# Altium PCB STM32_Tm1637_PCB1.PcbDoc
Units mil, origin at the board's own origin, x right, y up, seen from the top; angles counter-clockwise.
Board outline 6000 x 4000 mil, 2 copper layers (Top Layer, Bottom Layer); 31 components, 20 nets, 121 pads, 0 vias.
Unrouted connection lines stored in the file: 67.
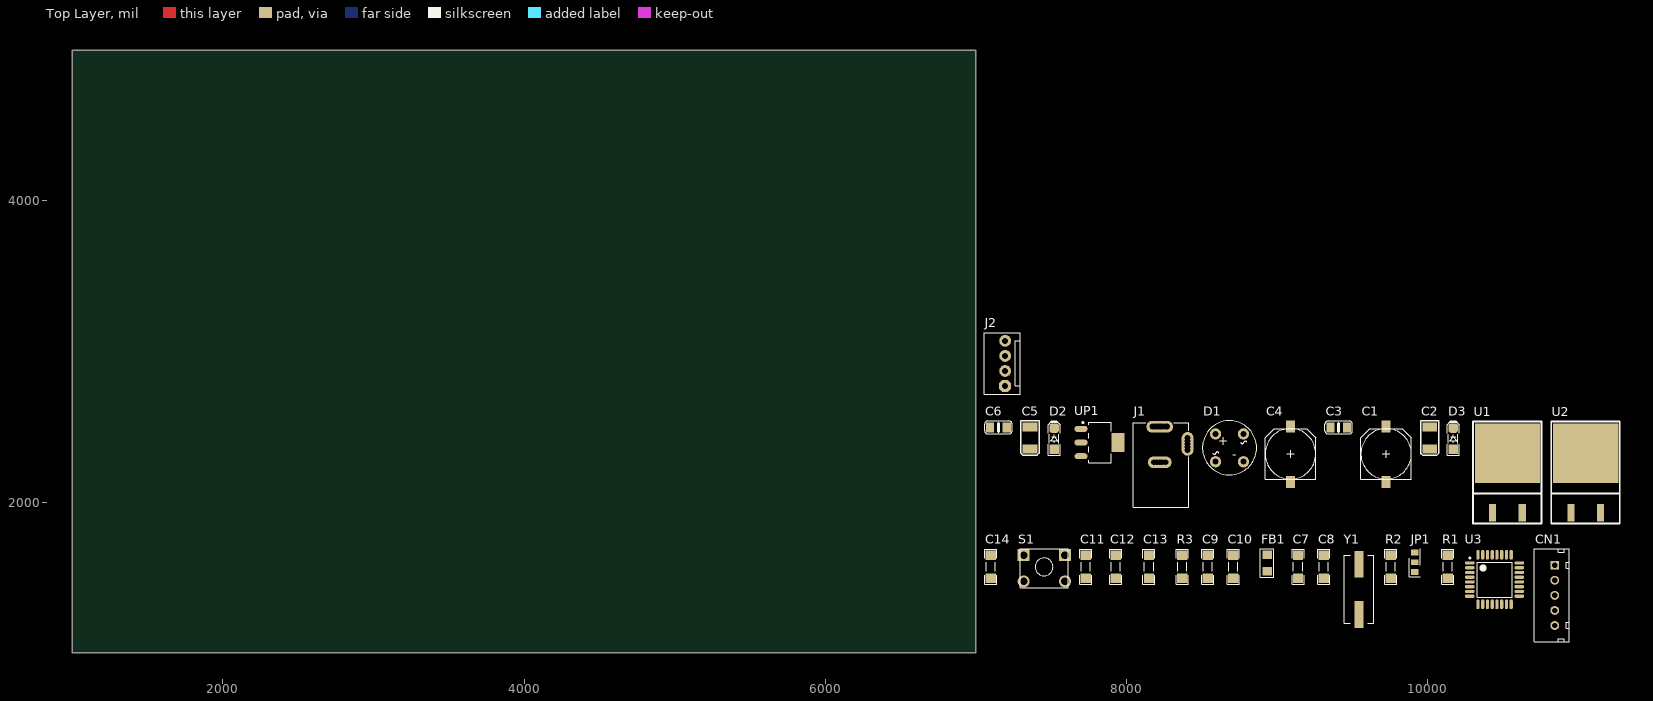
[diagram p0: Top Layer view]
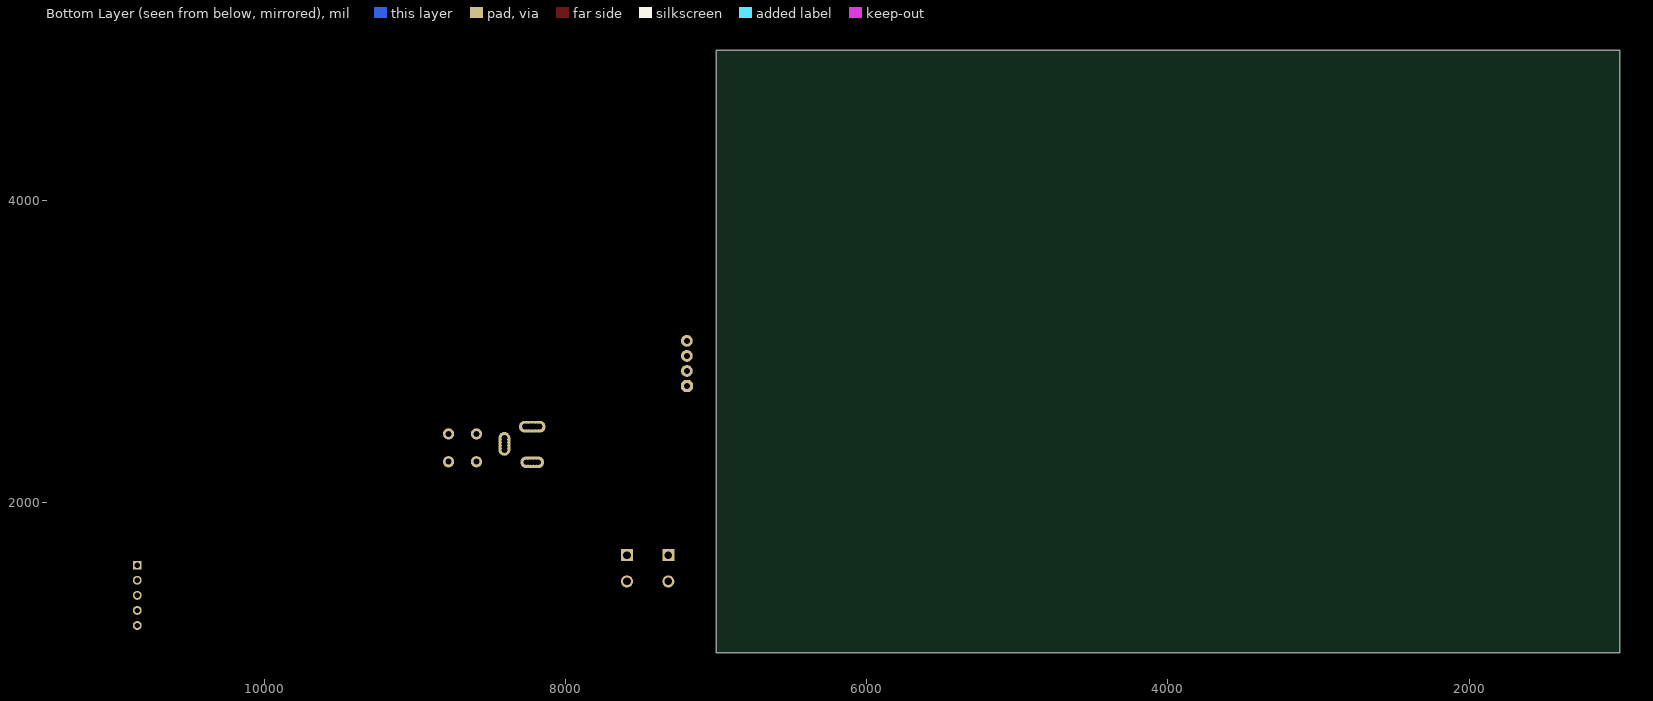
[diagram p1: Bottom Layer view, seen from below]

## Layer stack, top to bottom
Top Solder: solder mask 0.4, Solder Resist, Dk 3.5
Top Layer: signal copper 1.4
Dielectric 1: dielectric 12.6, FR-4, Dk 4.8
Bottom Layer: signal copper 1.4
Bottom Solder: solder mask 0.4, Solder Resist, Dk 3.5

## Board outline
1000,1000 7000,1000 7000,5000 1000,5000

## Design rules (kind name [scope] priority, off if disabled: settings)
Clearance [All] p1: gap=10 ignorepadtopadclearanceinfootprint=FALSE except(0: Arc-Hole Track-Hole SMDPad-Hole THPad-Hole Via-Hole Fill-Hole Poly-Hole Region-Hole Text-Hole)
PolygonConnect [All] p1: connectstyle=Relief reliefconductorwidth=10 reliefentries=4 polygonreliefangle="90 Angle" airgapwidth=10
RoutingVias [All] p1: holewidth=28 width=50 viastyle="Through Hole" minholewidth=28 minwidth=50 maxholewidth=28 maxwidth=50
SolderMaskExpansion [All] p1: expansion=4 istentingtop=FALSE
Width [All] p1: maxlimit=10 minlimit=10 preferedwidth=10
30 further rules are at their usual default settings.

## Classes and differential pairs
component class Tm1637: J2
component class PowerSupply: C1 C2 C3 C4 C5 C6 D1 D2 D3 J1 U1 U2 UP1
component class Microcontroller: C7 C8 C9 C10 C11 C12 C13 C14 CN1 FB1 JP1 R1 R2 R3 S1 U3 Y1

## Components (designator, comment, footprint, x,y, rotation, side; value= is the part's Value field where it differs from the comment)
C1 "" "CAPACITOR RADIAL SMT size F" 9725,2320 r90 top
C2 "Tantalium Cap" "Tantalium Size B" 10015,2425 r90 top
C3 "Capacitor SMD" "1206 Capacitor" 9410,2495 r0 top
C4 "" "CAPACITOR RADIAL SMT size F" 9090,2320 r90 top
C5 "Tantalium Cap" "Tantalium Size B" 7360,2425 r90 top
C6 "Capacitor SMD" "1206 Capacitor" 7150,2495 r0 top
C7 "22pF" CAPC4817X12N 9140,1570 r90 top
C8 "22pF" CAPC4817X12N 9310,1570 r90 top
C9 "0.1uF" CAPC4817X12N 8540,1570 r90 top
C10 "0.1uF" CAPC4817X12N 8710,1570 r90 top
C11 "0.1uF" CAPC4817X12N 7730,1570 r90 top
C12 "0.1uF" CAPC4817X12N 7930,1570 r90 top
C13 "0.1uF" CAPC4817X12N 8150,1570 r90 top
C14 "0.1uF" CAPC4817X12N 7100,1570 r90 top
CN1 "Header H5B-XHA" "Header H5B-XHA" 10835,1330 r90 top
D1 "Diode Bridge" "Bridge Circle Package" 8685,2360 r0 top
D2 "=VALUE" D_SOD80 7520,2420 r90 top
D3 "=VALUE" D_SOD80 10170,2420 r90 top
FB1 "Ferrit Bead" "1206 Ferrit Bead" 8935,1595 r90 top
J1 "DC Power Jack" "DC Power Jack 1" 8190,2500 r90 top
J2 "Tm1637" "CON WF_4" 7195,2920 r90 top
JP1 "Jumper" "Jumper Selector SMD" 9915,1600 r90 top
R1 "10K" RESC4817X04N 10135,1570 r90 top
R2 "10K" RESC4817X04N 9755,1570 r90 top
R3 "10K" RESC4817X04N 8370,1570 r90 top
S1 "Switch PB" "Switch - Push to On" 7455,1560 r0 top
U1 "7809-D2PAK" "D2PAK TO-263" 10530,2125 r0 top
U2 "7805-D2PAK" "D2PAK TO-263" 11050,2125 r0 top
U3 "STM32F030K6T6" STM-LQFP32_N 10445,1485 r0 top
UP1 "LM1117IMP-5.0" SOT223_4 7825,2395 r0 top value=LM1117IMP-3.3
Y1 "12 MHz" "Crystal SMD" 9545,1420 r90 top

## Footprints (in the part's own frame and the unit in brackets; to place one, negate y for a bottom-side part, rotate by r counter-clockwise, add the part's x,y. Pads: shape width x height; smd on the part's side, far side on the other; paste and mask are expansions set on the pad)
"1206 Capacitor" [mil]
  rect 55x65 smd: 1(-55,0) 2(55,0)
  silkscreen extent -92,-43 92,43, body extent -63,-31 63,31, height 39
"1206 Ferrit Bead" [mil]
  rect 55x65 smd: 1(-55,0) 2(55,0)
  silkscreen extent -95,-45 95,45, body extent -63,-31 63,31, height 26
"Bridge Circle Package" [mm] "Circle Bridge Rectifiers DESIGNER :Ali Hafizi"
  round 1.905 hole 1.016: 1(-2.35,2.35) 2(-2.35,-2.35) 3(2.35,-2.35) 4(2.35,2.35)
  silkscreen extent -4.57,-4.57 4.57,4.57, body extent -4.04,-4.07 4.06,4.03, height 5.21
"CAPACITOR RADIAL SMT size F" [mm]
  rect 2x1.5 smd mask+0.051: 1(4.603,0) 2(-4.75,0)
  silkscreen extent -4.26,-4.26 4.26,4.25, body extent -4.95,-4.15 4.95,4.15, height 10.02
CAPC4817X12N [mm] "Chip Capacitor, 2-Leads, Body 4/80x1/70mm, IPC Medium Density-Design:Abbas Basereh"
  rect 1.65x1.75 smd: 1(-1.95,0) 2(1.95,0)
  silkscreen extent -2.92,-1.02 2.92,1.02, body extent -1.6,-0.8 1.6,0.8, height 1
"CON WF_4" [mm] "DS1070  WF, Cvilux CI31 pitch 2.54mm-Designer Abbas Basereh"
  oct 2x2 hole 1: 1(-3.81,0)
  round 2 hole 1: 2(-1.27,0) 3(1.27,0) 4(3.81,0)
  silkscreen extent -5.2,-2.55 5.2,3.5, body extent -5.08,-2.4 5.08,3.4, height 11.56
"Crystal SMD" [mm] "DESIGNER ABBAS BASEREH"
  rect 4.5x1.5 smd: 1(-4.25,0) 2(4.25,0)
  silkscreen extent -5.75,-2.5 5.75,2.5, body extent -6.21,-2.25 6.09,2.25, height 5.18
"D2PAK TO-263" [mm]
  rect 1.2x3 smd: 1(-2.5,-5)
  rect 1.2x3 smd paste+0: 3(2.5,-5)
  rect 11x10 smd: 4(0,5.05)
  silkscreen extent -5.8,-6.8 5.75,10.4, body extent -5.08,-5.92 5.08,9.35, height 5.08
D_SOD80 [mm] "SOD-80 MINI-MELF 3.6X1.6mm, LL-34, LL4148"
  rect 1.6x1.6 smd paste-0.1: 1(-1.8,0)
  rrect50% 1.6x1.6 smd paste-0.1: 2(1.8,0)
  Top Layer pour cut-out: -1.016,1.016 1.016,1.016 1.016,-1.016 -1.016,-1.016
  silkscreen extent -2.8,-1 3,1, body extent -1.85,-0.8 1.85,0.8, height 2
"DC Power Jack 1" [mm] "Power Adaptor Jack"
  round 1.5 hole 1: 1(0,0.45) 1(0,0) 1(0,-0.4) 1(0,-1.2) 1(0,-1.6) 1(0,-2.05) 2(-6,-1.8) 2(-6,0.2) 2(-6,-1.3) 2(-6,-0.3) 3(-3.9,-5.5) 3(-3.4,-5.5) 3(-2.4,-5.5) 3(-1.9,-5.5)
  oval 2x4.5 hole 1: 1(0,-0.8)
  oval 2x4 hole 1: 2(-6,-0.8)
  oval 4x2 hole 1: 3(-2.9,-5.5)
  silkscreen extent -13.59,-5.7 0.7,3.7, body extent -13.68,-5.74 0.72,3.66, height 11.05
"Header H5B-XHA" [mm]
  rect 1.5x1.5 hole 0.9: 1(6.35,-0.25)
  round 1.5 hole 0.9: 2(3.81,-0.25) 3(1.27,-0.25) 4(-1.27,-0.25) 5(-3.81,-0.25)
  silkscreen extent -6.57,-2.7 9.1,3.25, body extent -6.52,-2.73 9.05,3.28, height 7
"Jumper Selector SMD" [mm]
  rect 0.95x1.3 smd: 1(-1.65,0) 2(0,0) 3(1.65,0)
  silkscreen extent -2.41,-0.89 2.29,0.89, body extent -1.85,-0.64 0.18,0.64, height 0.6
RESC4817X04N [mm] "Chip Resistor, 2-Leads, Body 4/80x1/70mm, IPC Medium Density-Design:Abbas Basereh"
  rect 1.65x1.75 smd: 1(-1.95,0) 2(1.95,0)
  silkscreen extent -2.92,-1.02 2.92,1.02, body extent -1.6,-0.8 1.6,0.8, height 1
SOT223_4 [mm] "SOT223, 4-Leads, Body 6.5x3.5mm, Pitch 2.30mm-Designer Abbas Basereh"
  oval 2.2x1 smd: 1(-3.2,2.3) 2(-3.2,0) 3(-3.2,-2.3)
  rect 2.2x3.2 smd: 4(3,0)
  Top Layer pour cut-out: -1.7,3.556 1.7,3.556 1.7,-3.556 -1.7,-3.556
  silkscreen extent -3.02,-3.4 1.9,3.47, body extent -3.5,-3.25 3.5,3.25, height 1.7
STM-LQFP32_N [mm] "QFP, 32-Leads, Body 7x7mm, Pitch 0.8mm, IPC Medium Density"
  oval 1.65x0.55 smd: 1(-4.175,2.8) 2(-4.175,2) 3(-4.175,1.2) 4(-4.175,0.4) 5(-4.175,-0.4) 6(-4.175,-1.2) 7(-4.175,-2) 8(-4.175,-2.8) 17(4.175,-2.8) 18(4.175,-2) 19(4.175,-1.2) 20(4.175,-0.4) 21(4.175,0.4) 22(4.175,1.2) 23(4.175,2) 24(4.175,2.8)
  oval 0.55x1.65 smd: 9(-2.8,-4.175) 10(-2,-4.175) 11(-1.2,-4.175) 12(-0.4,-4.175) 13(0.4,-4.175) 14(1.2,-4.175) 15(2,-4.175) 16(2.8,-4.175) 25(2.8,4.175) 26(2,4.175) 27(1.2,4.175) 28(0.4,4.175) 29(-0.4,4.175) 30(-1.2,4.175) 31(-2,4.175) 32(-2.8,4.175)
  silkscreen extent -4.3,-2.95 2.95,3.75, body extent -3.5,-3.5 3.5,3.5, height 1.6
"Switch - Push to On" [mil]
  rect 80x80 hole 50: 1(-137.5,87.5) 1(137.5,87.5)
  round 80 hole 50: 2(-137.5,-87.5) 2(137.5,-87.5)
  silkscreen extent -160,-130 160,130, body extent -155,-121 157,123, height 205
"Tantalium Size B" [mm]
  rect 1.5x2.5 smd paste+0.038 mask+0.038: 1(-1.831,0) 2(1.832,0)
  silkscreen extent -2.88,-1.53 2.88,1.53, body extent -1.83,-1.4 1.83,1.4, height 1.95

## Part data
C1 C2 C4 C5: library part "Capacitor Tantalium"
C7 C8 C9 C10 C11 C12 C13 C14: library part "CAP SMD 1206", "CAP 1206", Data=16-12-2016, Desc.="CAP SMD 1206", Designer="Abbas Basereh"
D1: library part "Diode Bridge TOTAL SIZE", "Full Wave Diode Bridge", ComponentLink1Description=Datasheet, ComponentLink2Description=Reference, Design Date=1395/11/09, Designer="Abbas Basereh", Mounting Technology="Surface Mount\Through-Hole", Status=Unreleased
D2 D3: library part DIODE_SMD_1N4148_SOD80, "DIODE, FAST SWTICHING, 0.3A, 0.5W", ASSEMBLY=ASSEMBLY, DESC=DESCRIPTION, MANF=MANF, MANF_P#=1N4148, PARAM=75V, PARAM2="300mA, 0.5W", PRICE=PRICE
J1: "DC Power Jack. Center Pin 2.5mm. Diameter: 5.7mm", Adding Date=10/21/2009, Company=Personal, Designer="Ali Hafizi", Project Name=Laser
J2: library part "Header 4 PIN Telecom.", "Header, 4-Pin Telecom.", Data=16-12-2016, Designer="Abbas Basereh"
JP1: library part "Jumper Selector", "Jumper Selector"
R1 R2 R3: library part "RES 1206 0.25W", "RES 1206", Data=16-12-2016, Desc.="RES SMD 1206", Designer="Abbas Basereh"
S1: "Push Button Switch"
U1: library part 7805-D2PAK
U3: "ARM Cortex-M0 32-bit MCU, 32 KB Flash, 4 KB Internal RAM, 26 I/Os, 32-pin LQFP, -40 to 85 degC, Tray", I/Os (High Current)=26, Operating Frequency(F) (Processor speed) (MHz)=48, Supplier Part Number 1=497-14046-ND, Supply Voltage(Vcc) min (V)=2.4, ComponentLink1Description="Manufacturer URL", ComponentLink1URL=http://www.st.com/web/en/home.html, ComponentLink2Description=Datasheet, ComponentLink2URL=http://www.st.com/st-web-ui/static/active/en/resource/technical/document/datasheet/DM00088500.pdf, ComponentLink3Description="Package Specification", ComponentLink3URL=http://www.st.com/st-web-ui/static/active/en/resource/technical/document/datasheet/DM00088500.pdf, Core="ARM Cortex-M0", DatasheetVersion="Rev. 1", FLASH Size (Prog) (kB)=32, Internal RAM Size (kB)=4, Mounting Technology="Surface Mount", PackageDescription="32-Pin Low Profile Quad Flat Package, 7 x 7 mm Body, 0.8 mm Pitch", PackageReference=LQFP32, PackageVersion="Rev. 1, 07/2013", Packing=Tray, PartNumber=STM32F030K6T6, Supplier 1=Digi-Key, Supplier 2=Newark, Supplier 3=Mouser, Supplier Part Number 2=19X6194, Supplier Part Number 3=511-STM32F030K6T6
UP1: library part LM1117IMP-x.x, "x.x Volt, 800mA Low-Dropout Linear Regulator, 4-pin SOT-223", Data=16-12-2016, Designer="Abbas Basereh"
Y1: library part XTAL_Crystal, "XTAL Crystal", ComponentLink1Description=Datasheet, ComponentLink2Description=Reference, Design Date=2017-1-3, Designer="ABBAS BASEREH", Mounting Technology="Surface Mount\Through-Hole", Status=Unreleased

## Nets (pads, with @x,y where several pads share a name; then routed paths per layer and width w, separated by ;. In a path a pad name is that pad's centre, name@x,y a point inside that pad or via, vN(x,y) a via of type N, cw(c..) or ccw(c..) an arc to the next point about the centre after c; other vN are vias at no path point)
BOOT: JP1.2 U3.31
CLK: J2.4 U3.7
DATA: J2.3 U3.8
GND: C1.2 C2.2 C3.1 C4.2 C5.2 C6.1 C7.1 C8.1 C9.1 C10.1 C11.1 C12.1 C13.1 C14.1 CN1.1 D1.3 J2.1 R2.1 S1.2 U1.4 U2.4 U3.16 U3.32 UP1.1
NetC4_1: C4.1 D3.1 U1.3
NetC5_1: C5.1 D2.1 UP1.2
NetC10_2: C10.2 FB1.2 U3.5
NetD1_2: D1.2 J1.1
NetD1_4: D1.4 J1.2 J1.3
NetJP1_1: JP1.1 R1.1
NetJP1_3: JP1.3 R2.2
NRST: C14.2 CN1.2 R3.1 S1.1 U3.4
OSC_IN: C7.2 U3.2 Y1.1
OSC_OUT: C8.2 U3.3 Y1.2
SWC: CN1.3 U3.24
SWD: CN1.4 U3.23
VCC3.3: C9.2 C11.2 C12.2 C13.2 CN1.5 D2.2 FB1.1 R1.2 R3.2 U3.1 U3.17
VCC5: C2.1 C6.2 J2.2 U2.3 UP1.3
VCC7.5: D3.2 U2.1
VIN: C1.1 C3.2 D1.1 U1.1
pads on no net: U3.6 U3.9 U3.10 U3.11 U3.12 U3.13 U3.14 U3.15 U3.18 U3.19 U3.20 U3.21 U3.22 U3.25 U3.26 U3.27 U3.28 U3.29 U3.30 UP1.4

## Text inside footprints (layer, text, board x,y; h text height)
D1: Top Overlay "-" at 8703.11,2287.17 h59.06; Top Overlay "+" at 8608.62,2376.14 h59.06